# Altium PCB sharp.PcbDoc
Units mm, origin at the board's own origin, x right, y up, seen from the top; angles counter-clockwise.
Board outline 20.57 x 45.09 mm, 2 copper layers (Top Layer, Bottom Layer); 7 components, 7 nets, 25 pads, 0 vias.
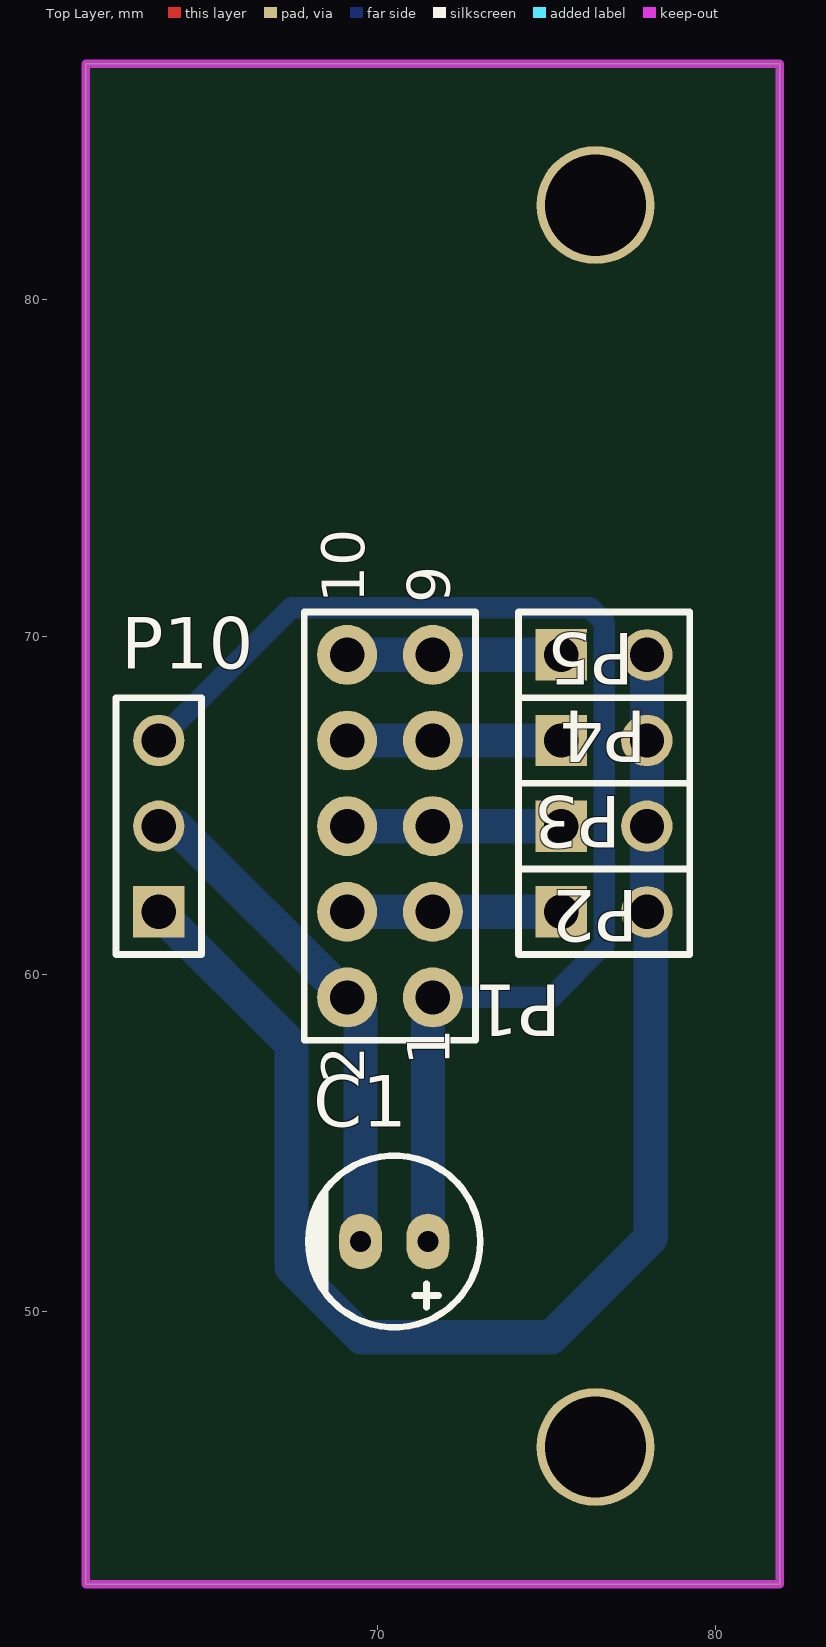
[diagram p0: Top Layer view]
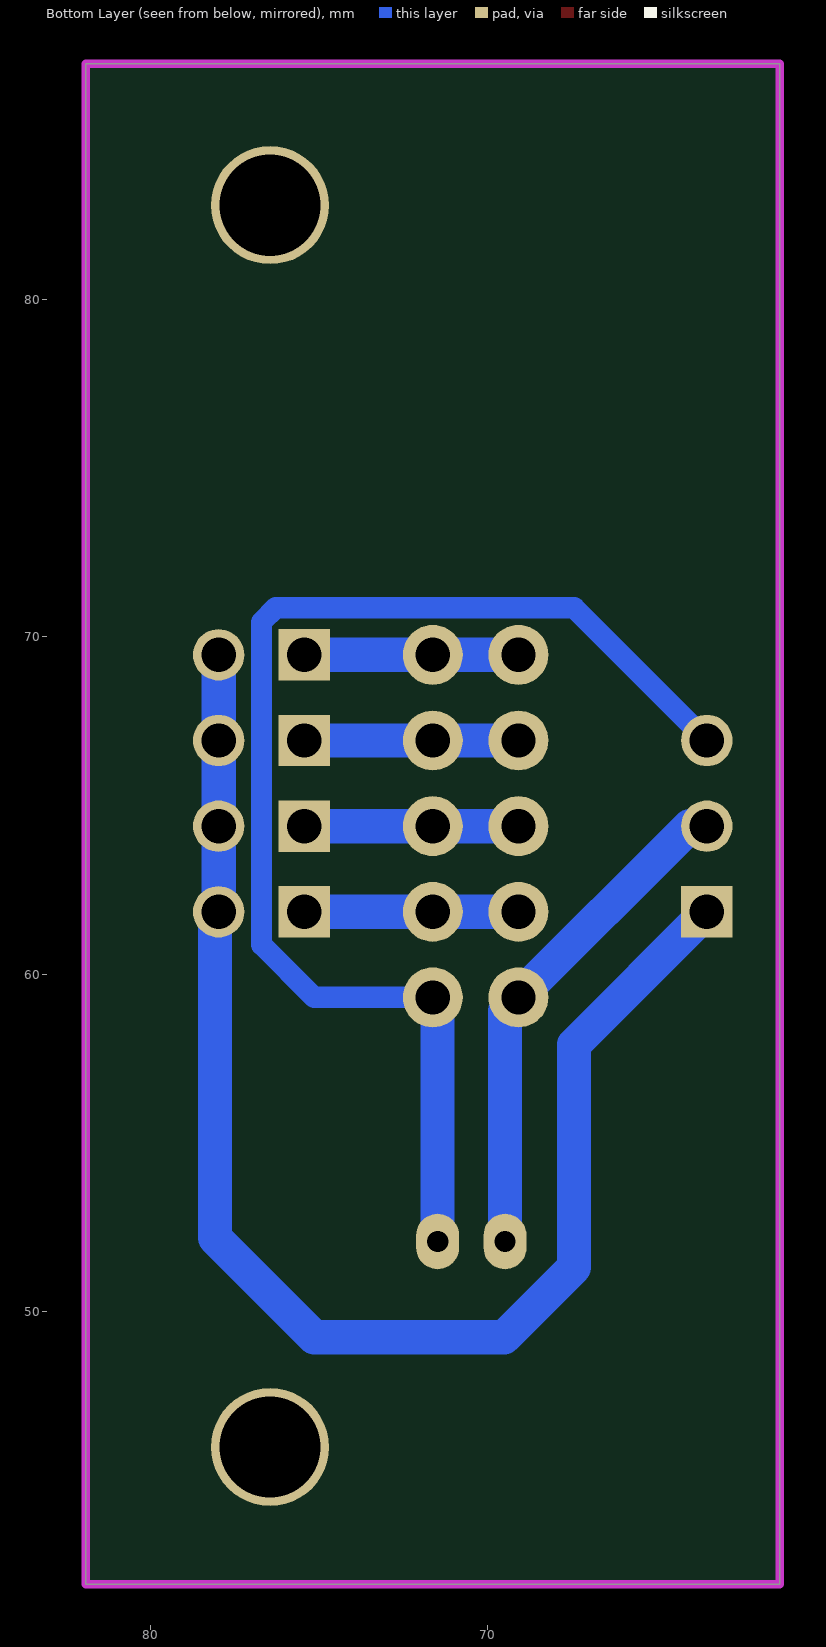
[diagram p1: Bottom Layer view, seen from below]

## Layer stack, top to bottom
Top Solder: solder mask 0.0102, Solder Resist, Dk 3.5
Top Layer: signal copper 0.0356
Dielectric 1: dielectric 0.32, FR-4, Dk 4.8
Bottom Layer: signal copper 0.0356
Bottom Solder: solder mask 0.0102, Solder Resist, Dk 3.5

## Board outline
61.341,41.91 61.341,86.995 81.915,86.995 81.915,41.91

## Design rules (kind name [scope] priority, off if disabled: settings)
Clearance [All] p1: gap=0.254 ignorepadtopadclearanceinfootprint=FALSE except(0: Arc-Hole Track-Hole SMDPad-Hole THPad-Hole Via-Hole Fill-Hole Poly-Hole Region-Hole Text-Hole)
PolygonConnect [All] p1: connectstyle=Relief reliefconductorwidth=0.254 reliefentries=4 polygonreliefangle="90 Angle" airgapwidth=0.254
RoomDefinition sharp [InComponentClass('sharp')] p1: confinementstyle=ConfineIn formatcopy=TRUE lockcomponents=FALSE outline 178.943,26.924 183.642,26.924 183.642,37.592 178.943,37.592
RoutingVias [All] p1: holewidth=0.711 width=1.27 viastyle="Through Hole" minholewidth=0.711 minwidth=1.27 maxholewidth=0.711 maxwidth=1.27
SolderMaskExpansion [All] p1: expansion=0.102
Width [All] p1: maxlimit=1.016 minlimit=0.254 preferedwidth=0.508
30 further rules are at their usual default settings.

## Components (designator, comment, footprint, x,y, rotation, side; value= is the part's Value field where it differs from the comment)
C1 "1uF" "cap 01" 70.485,52.07 r0 top
P1 "Header 5X2" HDR2X5 71.628,59.309 r90 top
P2 "Header 2" HDR1X2 75.438,61.849 r0 top
P3 "Header 2" HDR1X2 75.438,64.389 r0 top
P4 "Header 2" HDR1X2 75.438,66.929 r0 top
P5 "Header 2" HDR1X2 75.438,69.469 r0 top
P10 "Header 3" HDR1X3 63.5,61.849 r90 top

## Footprints (in the part's own frame and the unit in brackets; to place one, negate y for a bottom-side part, rotate by r counter-clockwise, add the part's x,y. Pads: shape width x height; smd on the part's side, far side on the other; paste and mask are expansions set on the pad)
"cap 01" [mm]
  oval 1.27x1.651 hole 0.635: 1(1,0) 2(-1,0)
  silkscreen extent -2.55,-2.55 2.55,2.55, body extent -2.53,-2.53 2.53,2.53, height 12.54
HDR1X2 [mil] "Connector; Header; 2 Position"
  rect 60x60 hole 40: 1(0,0)
  round 60 hole 40: 2(100,0)
  silkscreen extent -50,-50 150,50
HDR1X3 [mil] "Connector; Header; 3 Position"
  rect 60x60 hole 40: 1(0,0)
  round 60 hole 40: 2(100,0) 3(200,0)
  silkscreen extent -50,-50 250,50
HDR2X5 [mil] "Connector; Header; 5x2 Position"
  round 70 hole 40: 1(0,0) 2(0,100) 3(100,0) 4(100,100) 5(200,0) 6(200,100) 7(300,0) 8(300,100) 9(400,0) 10(400,100)
  silkscreen extent -50,-50 450,150

## Part data
C1: library part Cap-Polar, "Polar Capacitor", Voltage=16V, Adding Date=1387/12/20, Designer="Saeid Jorablo", Organazation=ControTec
P1: "Header, 5-Pin, Dual row", LatestRevisionDate=17-Jul-2002, LatestRevisionNote="Re-released for DXP Platform.", Publisher="Altium Limited"
P2 P3 P4 P5: "Header, 2-Pin", LatestRevisionDate=17-Jul-2002, LatestRevisionNote="Re-released for DXP Platform.", Publisher="Altium Limited"
P10: "Header, 3-Pin", LatestRevisionDate=17-Jul-2002, LatestRevisionNote="Re-released for DXP Platform.", Publisher="Altium Limited"

## Free pads (board coordinates)
  round 3.5 hole 3: 4(76.454,45.974) 4(76.454,82.804)

## Nets (pads, with @x,y where several pads share a name; then routed paths per layer and width w, separated by ;. In a path a pad name is that pad's centre, name@x,y a point inside that pad or via, vN(x,y) a via of type N, cw(c..) or ccw(c..) an arc to the next point about the centre after c; other vN are vias at no path point)
1: P1.3 P1.4 P2.1 | length 6.3
  Bottom Layer w1.016: P1.4 P2.1
2: P1.5 P1.6 P3.1 | length 6.3
  Bottom Layer w1.016: P1.6 P3.1
3: P1.7 P1.8 P4.1 | length 6.3
  Bottom Layer w1.016: P1.8 P4.1
4: P1.9 P1.10 P5.1 | length 6.3
  Bottom Layer w1.016: P1.10 P5.1
GND: C1.2 P1.2 P10.2 | length 15.1
  Bottom Layer w1.016: P10.2 64.008,64.389 P1.2 69.485,58.912 C1.2
NetP2_2: P2.2 P3.2 P4.2 P5.2 P10.1 | length 42.2
  Bottom Layer w1.016: P10.1 67.437,57.912 67.437,51.308 69.513,49.232 75.14,49.232 78.09,52.182 78.09,61.737 P2.2 P3.2 P5.2
VCC: C1.1 P1.1 P10.3 | length 37.6
  Bottom Layer w0.635: P10.3 67.437,70.866 76.283,70.866 76.708,70.441 76.708,60.877 75.14,59.309 P1.1
  Bottom Layer w1.016: C1.1 71.485,59.166 P1.1

## Keep-outs
Keep-Out Layer:
  the board outline again, w0.254

## Text inside footprints (layer, text, board x,y; h text height)
P1: Top Overlay "10" at 69.596,70.993 h1.27 r90; Top Overlay "9" at 72.136,70.993 h1.27 r90; Top Overlay "1" at 72.136,57.277 h1.27 r90; Top Overlay "2" at 69.596,56.769 h1.27 r90